# EAGLE board acoustics (EAGLE 9.1.3)
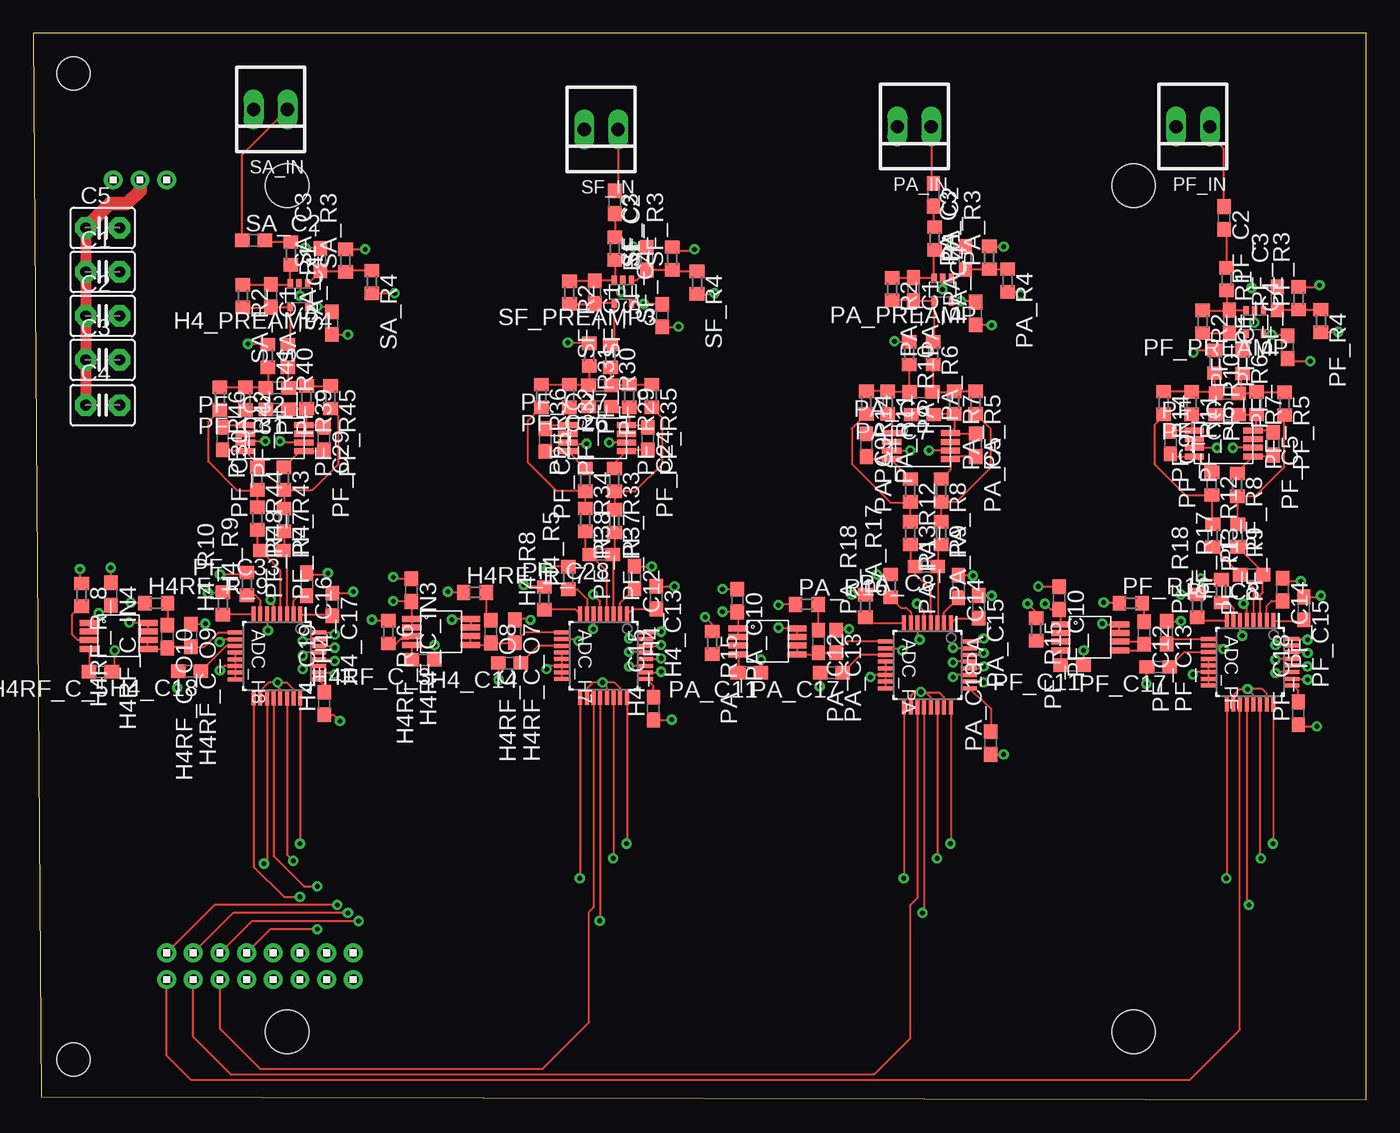
[diagram p0: board, top side]
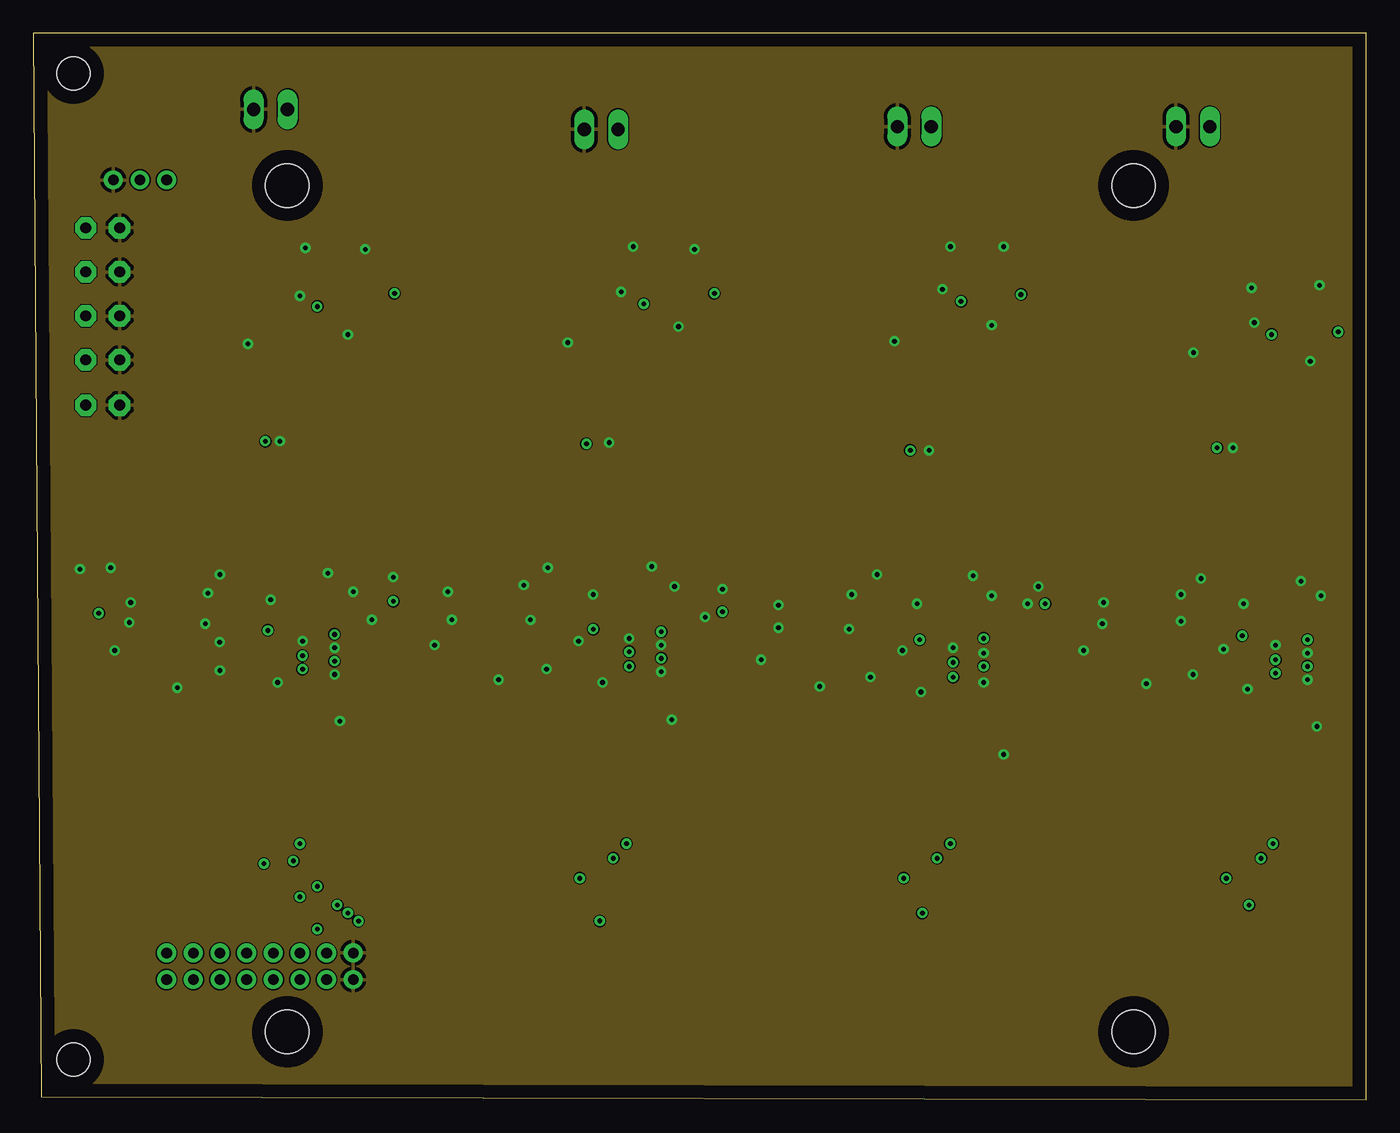
[diagram p1: board, inner layer GND]
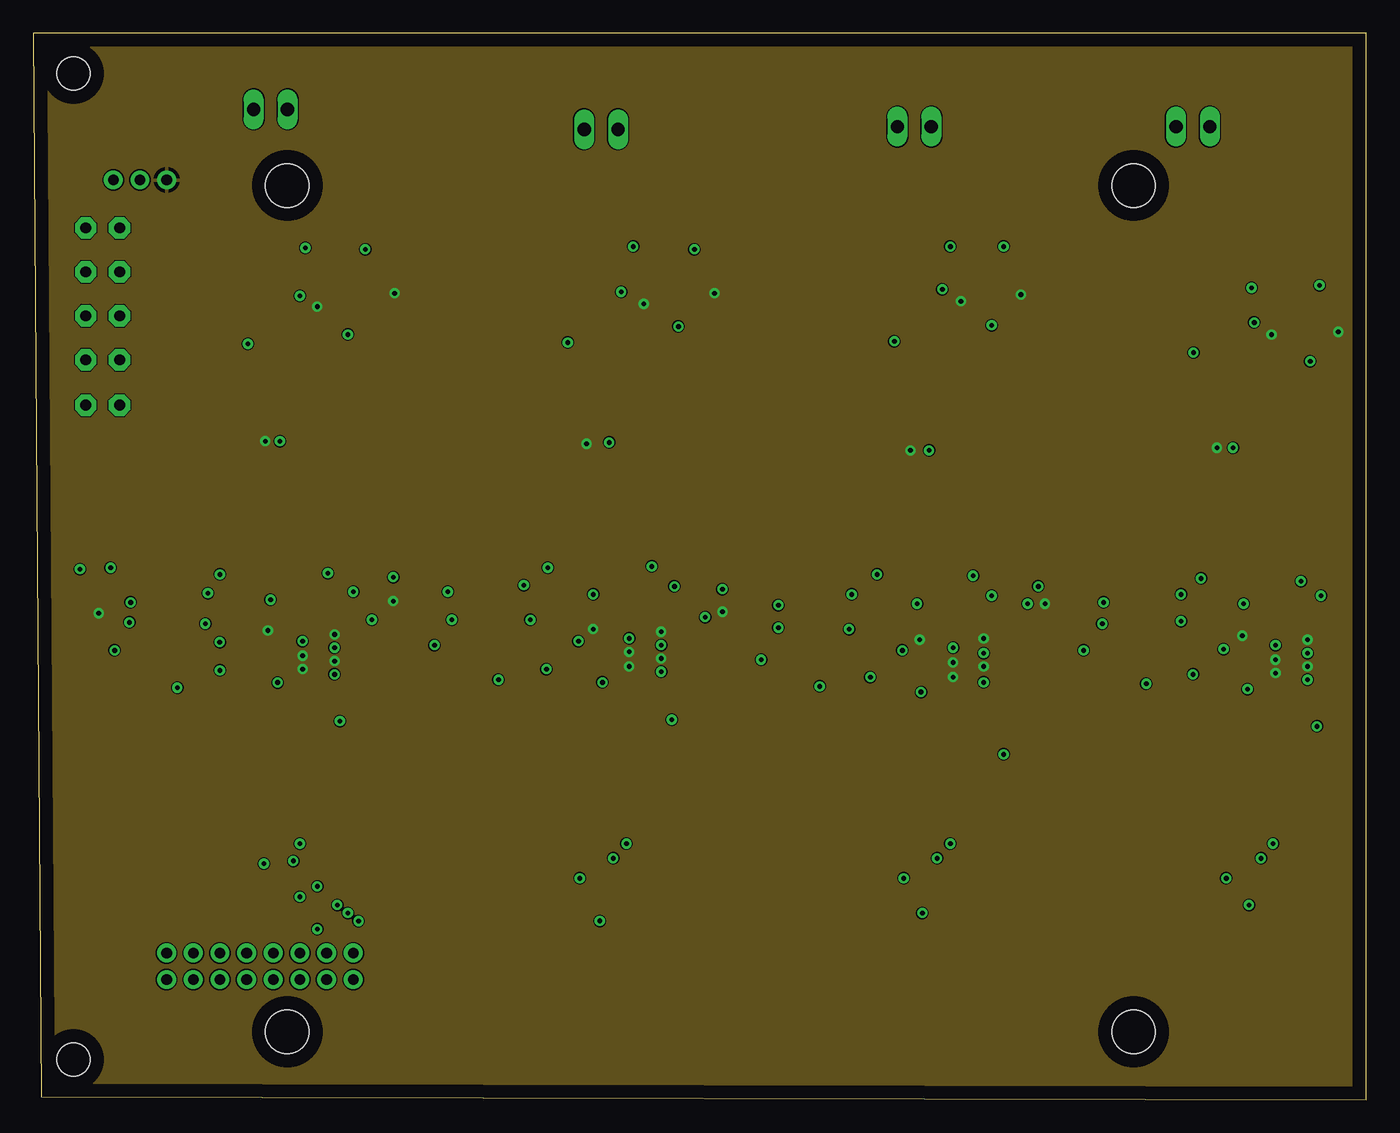
[diagram p2: board, inner layer +3v3]
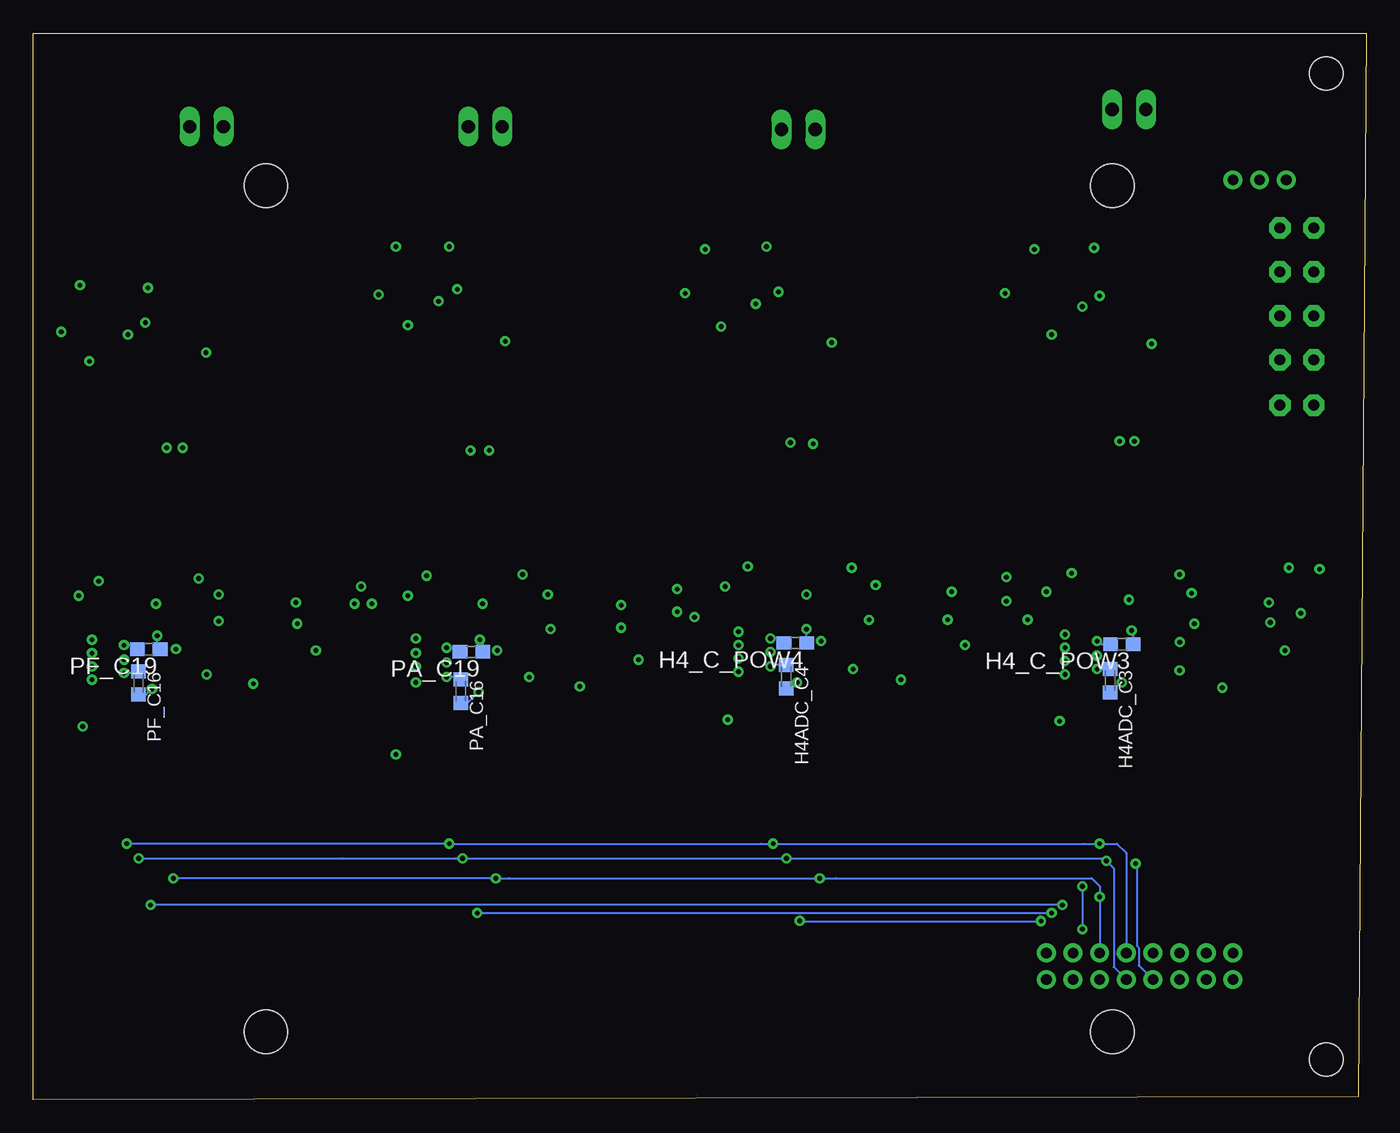
[diagram p3: board, bottom side, seen from below]

Size 100 x 80 mm. Coordinates in mm from the lower left corner, seen from the top.
Outline: 0.6,0.2 100,0 100,80 0,80 0.6,0.2
Copper layers (1+2*15+16): Top 0.035mm / dielectric 1.5mm / GND 0.017mm / dielectric 0.15mm / +3v3 0.017mm / dielectric 0.2mm / Bottom 0.035mm
Design rules "default *": minimum track width 3.5mil, minimum drill 0.2mm, track to track 3.5mil, track to pad 3.5mil, pad to pad 3.5mil, via to via 3.5mil, smd to smd 0mil, copper to edge 40mil, drill to drill 6mil, minimum pad ring 10mil, minimum via ring 8mil, stop-mask expansion 4mil, vias tented up to drill 0mil, thermal gap 10mil
Holes 2.5 mm at 3,77 3,3
Holes 3.26 mm at 19.05,68.58 82.55,68.58 82.55,5.08 19.05,5.08

## Footprints (pad centres in the part's own frame; a part is rotated, then mirrored left to right if it is on the bottom)
PBS0032A_L = smd 1.2 x 0.3: 1 -3.1,1.75; 2 -3.1,1.25; 3 -3.1,0.75; 4 -3.1,0.25; 5 -3.1,-0.25; 6 -3.1,-0.75; 7 -3.1,-1.25; 8 -3.1,-1.75; 17 3.1,-1.75; 18 3.1,-1.25; 19 3.1,-0.75; 20 3.1,-0.25; 21 3.1,0.25; 22 3.1,0.75; 23 3.1,1.25; 24 3.1,1.75 | smd 0.3 x 1.2: 9 -1.75,-3.1; 10 -1.25,-3.1; 11 -0.75,-3.1; 12 -0.25,-3.1; 13 0.25,-3.1; 14 0.75,-3.1; 15 1.25,-3.1; 16 1.75,-3.1; 25 1.75,3.1; 26 1.25,3.1; 27 0.75,3.1; 28 0.25,3.1; 29 -0.25,3.1; 30 -0.75,3.1; 31 -1.25,3.1; 32 -1.75,3.1
C2.5-3 = drill 0.813 pad 1.6 octagon: 1 -1.27,0; 2 1.27,0
C0603 = smd 1.1 x 1: 1 -0.85,0; 2 0.85,0
SC70-5 = smd 0.4 x 0.7: 1 -0.65,-0.85; 2 0,-0.85; 3 0.65,-0.85; 4 0.65,0.85; 5 -0.65,0.85
R0603 = smd 1 x 1.1: 1 -0.85,0; 2 0.85,0
REF6025 = smd 0.45 x 1.45: 1 -0.975,-2.2; 2 -0.325,-2.2; 3 0.325,-2.2; 4 0.975,-2.2; 5 0.975,2.2; 6 0.325,2.2; 7 -0.325,2.2; 8 -0.975,2.2
C0603K = smd 1.05 x 1.08: 1 -0.875,0; 2 0.875,0
VSSOP-8 = smd 0.45 x 1.45: 1 0,0; 2 0.65,0; 3 1.3,0; 4 1.95,0; 5 1.95,4.4; 6 1.3,4.4; 7 0.65,4.4; 8 0,4.4
22-23-2021 = drill 1 long: 1 -1.27,0; 2 1.27,0
1X3 = drill 0.8 pad 1.422: 1 -2,0; 2 0,0; 3 2,0
2X8 = drill 0.8 pad 1.422: 1 -7,-1; 2 -7,1; 3 -5,-1; 4 -5,1; 5 -3,-1; 6 -3,1; 7 -1,-1; 8 -1,1; 9 1,-1; 10 1,1; 11 3,-1; 12 3,1; 13 5,-1; 14 5,1; 15 7,-1; 16 7,1

## Placement (x,y rotation side)
ADC_H7  ADS124S08IPBSRPBS0032A_L  [PBS0032A_L]  42.78,33.3 270 top
ADC_H8  ADS124S08IPBSRPBS0032A_L  [PBS0032A_L]  18.28,33.28 270 top
ADC_PA  ADS124S08IPBSRPBS0032A_L  [PBS0032A_L]  67.08,32.61 270 top
ADC_PF  ADS124S08IPBSRPBS0032A_L  [PBS0032A_L]  91.28,32.83 270 top
C1  [C2.5-3]  5.2,62.1 0 top
C2  [C2.5-3]  5.2,58.8 0 top
C3  [C2.5-3]  5.2,55.5 0 top
C4  [C2.5-3]  5.2,52.1 0 top
C5  [C2.5-3]  5.2,65.4 0 top
H4_C12  1uf  [C0603]  45.11,39.17 270 top
H4_C13  1uf  [C0603]  46.73,37.65 270 top
H4_C14  1uf  [C0603]  35.73,32.75 180 top
H4_C15  1uf  [C0603]  46.53,29.33 90 top
H4_C16  1uf  [C0603]  20.51,38.66 270 top
H4_C17  1uf  [C0603]  22.43,37.14 270 top
H4_C18  1uf  [C0603]  11.72,32.14 180 top
H4_C19  1uf  [C0603]  21.83,29.72 90 top
H4_C_POW3  1uf  [C0603]  18.33,34.17 180 bottom
H4_C_POW4  1uf  [C0603]  42.83,34.26 180 bottom
H4_PREAMP4  TLV6741  [SC70-5]  19.93,60.34 180 top
H4_R5  60.4k  [R0603]  40.12,39.13 90 top
H4_R8  10K  [R0603]  38.33,37.61 90 top
H4_R9  60.4k  [R0603]  16.03,38.7 90 top
H4_R10  10K  [R0603]  14.22,37.22 90 top
H4_REFGEN3  REF6025  [REF6025]  30.59,35.09 270 top
H4_REFGEN4  REF6025  [REF6025]  6.39,34.79 270 top
H4ADC_C3  1uf  [C0603K]  19.21,31.43 270 bottom
H4ADC_C4  1uf  [C0603K]  43.51,31.71 270 bottom
H4RF_C_3  1uf  [C0603]  29.23,32.99 180 top
H4RF_C_5  1uf  [C0603]  5.03,32.09 180 top
H4RF_C_IN3  10uf  [C0603]  28.36,38.22 270 top
H4RF_C_IN4  10uf  [C0603]  5.83,37.94 270 top
H4RF_C_O7  100nf  [C0603]  36.13,35.13 270 top
H4RF_C_O8  47uf  [C0603]  34.33,35.11 270 top
H4RF_C_O9  100nf  [C0603]  11.83,34.81 270 top
H4RF_C_O10  47uf  [C0603]  10.06,34.73 270 top
H4RF_R_6  121k  [R0603]  26.63,35.07 270 top
H4RF_R_7  47m  [R0603]  33.13,38.05 0 top
H4RF_R_8  121k  [R0603]  3.63,37.87 270 top
H4RF_R_9  47m  [R0603]  9.23,37.25 0 top
PA_C1  1pF  [C0603]  66.03,60.82 270 top
PA_C2  5nF  [C0603]  67.53,67.88 270 top
PA_C3  10uF  [C0603]  69.93,63.15 90 top
PA_C4  100nF  [C0603]  70.69,58.98 90 top
PA_C5  270pF  [C0603]  70.7,49.1 270 top
PA_C6  470 pF  [C0603]  66.6,53.1 180 top
PA_C7  1nF  [C0603]  66.7,51.4 180 top
PA_C8  22nF  [C0603]  67,40 180 top
PA_C9  270pF  [C0603]  62.5,49.1 270 top
PA_C10  10uf  [C0603]  52.82,37.44 270 top
PA_C11  1uf  [C0603]  53.71,32.03 180 top
PA_C12  47uf  [C0603]  58.91,34.37 270 top
PA_C13  100nf  [C0603]  60.23,34.37 270 top
PA_C14  1uf  [C0603]  69.41,38.49 270 top
PA_C15  1uf  [C0603]  70.93,36.97 270 top
PA_C16  1uf  [C0603K]  67.91,30.64 270 bottom
PA_C17  1uf  [C0603]  59.89,32.03 180 top
PA_C18  1uf  [C0603]  71.83,26.75 90 top
PA_C19  1uf  [C0603]  67.13,33.59 180 bottom
PA_DA  THS4551  [VSSOP-8]  64.4,50 270 top
PA_IN  22-23-2021  [22-23-2021]  66.1,73 180 top
PA_PREAMP  TLV6741  [SC70-5]  68.23,60.76 180 top
PA_R1  10k  [R0603]  67.63,64.6 270 top
PA_R2  1 M  [R0603]  64.43,60.8 270 top
PA_R3  100k  [R0603]  71.73,63.16 90 top
PA_R4  100k  [R0603]  73.09,61.46 270 top
PA_R5  1.2k  [R0603]  70.7,52.3 270 top
PA_R6  1.2K  [R0603]  67.5,56 270 top
PA_R7  330  [R0603]  69.1,52.3 270 top
PA_R8  5  [R0603]  68.1,45.7 270 top
PA_R9  10  [R0603]  68.1,42.5 270 top
PA_R10  1.2k  [R0603]  65.7,56 270 top
PA_R11  330  [R0603]  64.1,52.3 270 top
PA_R12  5  [R0603]  65.8,45.7 270 top
PA_R13  10  [R0603]  65.8,42.5 270 top
PA_R14  1.2k  [R0603]  62.5,52.3 270 top
PA_R15  121k  [R0603]  50.93,34.27 270 top
PA_R16  47m  [R0603]  58.03,37.15 0 top
PA_R17  60.4k  [R0603]  64.31,38.55 90 top
PA_R18  10K  [R0603]  62.43,37.03 90 top
PA_REFGEN  REF6025  [REF6025]  55.09,34.39 270 top
PF_C1  1pF  [C0603]  89.73,58.38 270 top
PF_C2  5nF  [C0603]  89.33,66.14 270 top
PF_C3  10uF  [C0603]  93.33,60.1 90 top
PF_C4  100nF  [C0603]  94.09,56.44 90 top
PF_C5  270pF  [C0603]  93.02,49.2 270 top
PF_C6  470 pF  [C0603]  89.58,53 180 top
PF_C7  1nF  [C0603]  89.57,51.4 180 top
PF_C8  22nF  [C0603]  91.41,39.38 180 top
PF_C9  270pF  [C0603]  85.31,49.29 270 top
PF_C10  10uf  [C0603]  76.96,37.62 270 top
PF_C11  1uf  [C0603]  77.93,32.59 180 top
PF_C12  47uf  [C0603]  83.33,35.01 270 top
PF_C13  100nf  [C0603]  85.03,35.03 270 top
PF_C14  1uf  [C0603]  93.73,38.26 270 top
PF_C15  1uf  [C0603]  95.31,36.86 270 top
PF_C16  1uf  [C0603K]  92.1,31.26 270 bottom
PF_C17  1uf  [C0603]  84.4,32.46 180 top
PF_C18  1uf  [C0603]  94.91,28.98 90 top
PF_C19  1uf  [C0603]  91.33,33.78 180 bottom
PF_C24  270pF  [C0603]  46.1,49.6 270 top
PF_C25  270pF  [C0603]  38.4,49.5 270 top
PF_C26  1nF  [C0603]  42.5,52 180 top
PF_C27  470 pF  [C0603]  42.5,53.6 180 top
PF_C28  22nF  [C0603]  42.6,40.9 180 top
PF_C29  270pF  [C0603]  21.8,49.6 270 top
PF_C30  270pF  [C0603]  14.2,49.6 270 top
PF_C31  1nF  [C0603]  18.3,51.8 180 top
PF_C32  470 pF  [C0603]  18.3,53.4 180 top
PF_C33  22nF  [C0603]  17.9,41.2 180 top
PF_DA  THS4551  [VSSOP-8]  87.1,50.2 270 top
PF_DA2  THS4551  [VSSOP-8]  40.1,50.6 270 top
PF_DA3  THS4551  [VSSOP-8]  15.9,50.6 270 top
PF_IN  22-23-2021  [22-23-2021]  87,73 180 top
PF_PREAMP  TLV6741  [SC70-5]  91.63,58.32 180 top
PF_R1  10k  [R0603]  89.53,61.56 270 top
PF_R2  1 M  [R0603]  87.73,58.36 270 top
PF_R3  100k  [R0603]  94.93,60.12 90 top
PF_R4  100k  [R0603]  96.59,58.42 270 top
PF_R5  1.2k  [R0603]  93.87,52.21 270 top
PF_R6  1.2K  [R0603]  90.73,55.32 270 top
PF_R7  330  [R0603]  91.78,52.24 270 top
PF_R8  5  [R0603]  90.33,46.12 270 top
PF_R9  10  [R0603]  90.36,42.33 270 top
PF_R10  1.2k  [R0603]  88.63,55.36 270 top
PF_R11  330  [R0603]  86.91,52.26 270 top
PF_R12  5  [R0603]  88.42,46.2 270 top
PF_R13  10  [R0603]  88.49,42.3 270 top
PF_R14  1.2k  [R0603]  84.79,52.27 270 top
PF_R15  121k  [R0603]  75.23,35.26 270 top
PF_R16  47m  [R0603]  82.33,37.24 0 top
PF_R17  60.4k  [R0603]  89.13,38.14 90 top
PF_R18  10K  [R0603]  87.31,37.04 90 top
PF_R29  330  [R0603]  44.7,52.8 270 top
PF_R30  1.2K  [R0603]  43.3,55.8 270 top
PF_R31  1.2k  [R0603]  41.7,55.9 270 top
PF_R32  330  [R0603]  40.2,52.8 270 top
PF_R33  5  [R0603]  43.6,46.5 270 top
PF_R34  5  [R0603]  41.4,46.5 270 top
PF_R35  1.2k  [R0603]  46.4,52.8 270 top
PF_R36  1.2k  [R0603]  38.1,52.8 270 top
PF_R37  10  [R0603]  43.6,43.4 270 top
PF_R38  10  [R0603]  41.4,43.5 270 top
PF_R39  330  [R0603]  20.5,52.7 270 top
PF_R40  1.2K  [R0603]  19.1,55.8 270 top
PF_R41  1.2k  [R0603]  17.6,55.8 270 top
PF_R42  330  [R0603]  15.9,52.6 270 top
PF_R43  5  [R0603]  18.8,46.6 270 top
PF_R44  5  [R0603]  16.8,46.6 270 top
PF_R45  1.2k  [R0603]  22.3,52.7 270 top
PF_R46  1.2k  [R0603]  14,52.6 270 top
PF_R47  10  [R0603]  18.8,43.5 270 top
PF_R48  10  [R0603]  16.8,43.6 270 top
PF_REFGEN  REF6025  [REF6025]  79.29,34.68 270 top
SA_C1  1pF  [C0603]  17.83,60.3 270 top
SA_C2  5nF  [C0603]  16.53,64.46 0 top
SA_C3  10uF  [C0603]  21.53,63.02 90 top
SA_C4  100nF  [C0603]  22.39,58.26 90 top
SA_IN  22-23-2021  [22-23-2021]  17.8,74.3 180 top
SA_R1  10k  [R0603]  19.33,63.48 270 top
SA_R2  1 M  [R0603]  15.73,60.28 270 top
SA_R3  100k  [R0603]  23.43,62.94 90 top
SA_R4  100k  [R0603]  25.39,61.34 270 top
SF_C1  1pF  [C0603]  42.13,60.56 270 top
SF_C2  5nF  [C0603]  43.63,67.32 270 top
SF_C3  10uF  [C0603]  46.03,63.09 90 top
SF_C4  100nF  [C0603]  47.19,58.82 90 top
SF_IN  22-23-2021  [22-23-2021]  42.6,72.8 180 top
SF_PREAMP3  TLV6741  [SC70-5]  44.23,60.6 180 top
SF_R1  10k  [R0603]  43.63,63.84 270 top
SF_R2  1 M  [R0603]  40.23,60.54 270 top
SF_R3  100k  [R0603]  47.93,63.1 90 top
SF_R4  100k  [R0603]  49.8,61.3 270 top
U$1  1X3  [1X3]  8,69 180 top
U$2  2X8  [2X8]  17,10 0 top

## Library data of the parts
ADC_H7 ADC_H8 ADC_PA ADC_PF = ADS127L01_ADC
C1-C5 = capacitor-wima
H4_C12-H4_C19 H4_C_POW3 H4_C_POW4 H4_R5 H4_R8-H4_R10 H4ADC_C3 H4ADC_C4 H4RF_C_3 H4RF_C_5 H4RF_C_IN3 H4RF_C_IN4 H4RF_C_O7-H4RF_C_O10 PA_C10-PA_C19 PA_R17 PA_R18 PF_C10-PF_C19 PF_R17 PF_R18 = rcl
H4_PREAMP4 PA_PREAMP PF_PREAMP SF_PREAMP3 = lio
H4_REFGEN3 H4_REFGEN4 PA_REFGEN PF_REFGEN = REF6025
H4RF_R_6-H4RF_R_9 PA_C1-PA_C9 PA_R1-PA_R16 PF_C1-PF_C9 PF_C24-PF_C33 PF_R1-PF_R16 PF_R29-PF_R48 SA_C1-SA_C4 SA_R1-SA_R4 SF_C1-SF_C4 SF_R1-SF_R4 = resistor
PA_DA PF_DA PF_DA2 PF_DA3 = THS4551
PA_IN PF_IN SA_IN SF_IN = con-molex; MF: MOLEX; MPN: 22-23-2021; OC_FARNELL: 1462926; OC_NEWARK: 25C3832
U$1 U$2 = headers(2mm)

## Nets
+3V3: ADC_H7.6 ADC_H7.27 ADC_H7.28 ADC_H7.29 ADC_H7.32 ADC_H8.6 ADC_H8.27 ADC_H8.28 ADC_H8.29 ADC_H8.32 ADC_PA.6 ADC_PA.27 ADC_PA.28 ADC_PA.29 ADC_PA.32 ADC_PF.6 ADC_PF.27 ADC_PF.28 ADC_PF.29 ADC_PF.32 H4_C_POW3.1 H4_C_POW4.1 H4_PREAMP4.5 H4_REFGEN3.1 H4_REFGEN3.2 H4_REFGEN4.1 H4_REFGEN4.2 H4ADC_C3.1 H4ADC_C4.1 H4RF_C_IN3.2 H4RF_C_IN4.2 PA_C4.2 PA_C10.2 PA_C16.1 PA_C19.1 PA_DA.3 PA_PREAMP.5 PA_R4.2 PA_REFGEN.1 PA_REFGEN.2 PF_C4.2 PF_C10.2 PF_C16.1 PF_C19.1 PF_DA2.3 PF_DA3.3 PF_DA.3 PF_PREAMP.5 PF_R4.2 PF_REFGEN.1 PF_REFGEN.2 SA_C4.2 SA_R4.2 SF_C4.2 SF_PREAMP3.5 SF_R4.2 U$1.1
+5V: C1.1 C2.1 C3.1 C4.1 C5.1 U$1.2
AMPED_PA: PA_C1.2 PA_PREAMP.4 PA_R2.2 PA_R6.1
AMPED_PF: PF_C1.2 PF_PREAMP.4 PF_R2.2 PF_R6.1
AMPED_SA: H4_PREAMP4.4 PF_R40.1 SA_C1.2 SA_R2.2
AMPED_SF: PF_R30.1 SF_C1.2 SF_PREAMP3.4 SF_R2.2
CLK: ADC_H7.24 ADC_H8.24 ADC_PA.24 ADC_PF.24 U$2.10
DIFF_N_PA: ADC_PA.3 PA_C8.1 PA_R9.2
DIFF_N_PF: ADC_PF.3 PF_C8.1 PF_R9.2
DIFF_N_SA: ADC_H8.3 PF_C33.1 PF_R47.2
DIFF_N_SF: ADC_H7.3 PF_C28.1 PF_R37.2
DIFF_P_PA: ADC_PA.4 PA_C8.2 PA_R13.2
DIFF_P_PF: ADC_PF.4 PF_C8.2 PF_R13.2
DIFF_P_SA: ADC_H8.4 PF_C33.2 PF_R48.2
DIFF_P_SF: ADC_H7.4 PF_C28.2 PF_R38.2
DOUT_PA: ADC_PA.20 U$2.4
DOUT_PF: ADC_PF.20 U$2.2
DOUT_SA: ADC_H8.20 U$2.8
DOUT_SF: ADC_H7.20 U$2.6
DRDY_PA: ADC_PA.19 U$2.3
DRDY_PF: ADC_PF.19 U$2.1
DRDY_SA: ADC_H8.19 U$2.7
DRDY_SF: ADC_H7.19 U$2.5
GND: ADC_H7.5 ADC_H7.10 ADC_H7.12 ADC_H7.13 ADC_H7.14 ADC_H7.15 ADC_H7.16 ADC_H7.18 ADC_H7.21 ADC_H7.23 ADC_H7.26 ADC_H7.30 ADC_H7.31 ADC_H8.5 ADC_H8.10 ADC_H8.12 ADC_H8.13 ADC_H8.14 ADC_H8.15 ADC_H8.16 ADC_H8.18 ADC_H8.21 ADC_H8.23 ADC_H8.26 ADC_H8.30 ADC_H8.31 ADC_PA.5 ADC_PA.10 ADC_PA.12 ADC_PA.13 ADC_PA.14 ADC_PA.15 ADC_PA.16 ADC_PA.18 ADC_PA.21 ADC_PA.23 ADC_PA.26 ADC_PA.30 ADC_PA.31 ADC_PF.5 ADC_PF.10 ADC_PF.12 ADC_PF.13 ADC_PF.14 ADC_PF.15 ADC_PF.16 ADC_PF.18 ADC_PF.21 ADC_PF.23 ADC_PF.26 ADC_PF.30 ADC_PF.31 C1.2 C2.2 C3.2 C4.2 C5.2 H4_C12.1 H4_C13.1 H4_C14.2 H4_C15.1 H4_C16.1 H4_C17.1 H4_C18.2 H4_C19.1 H4_C_POW3.2 H4_C_POW4.2 H4_PREAMP4.2 H4_R5.2 H4_R8.2 H4_R9.2 H4_R10.2 H4_REFGEN3.7 H4_REFGEN3.8 H4_REFGEN4.7 H4_REFGEN4.8 H4ADC_C3.2 H4ADC_C4.2 H4RF_C_3.1 H4RF_C_5.1 H4RF_C_IN3.1 H4RF_C_IN4.1 H4RF_C_O7.1 H4RF_C_O9.1 H4RF_R_6.1 H4RF_R_7.1 H4RF_R_8.1 H4RF_R_9.1 PA_C3.2 PA_C4.1 PA_C10.1 PA_C11.1 PA_C13.1 PA_C14.1 PA_C15.1 PA_C16.2 PA_C17.2 PA_C18.1 PA_C19.2 PA_DA.6 PA_IN.2 PA_PREAMP.2 PA_R3.2 PA_R10.1 PA_R15.1 PA_R16.1 PA_R17.2 PA_R18.2 PA_REFGEN.7 PA_REFGEN.8 PF_C3.2 PF_C4.1 PF_C10.1 PF_C11.1 PF_C13.1 PF_C14.1 PF_C15.1 PF_C16.2 PF_C17.2 PF_C18.1 PF_C19.2 PF_DA2.6 PF_DA3.6 PF_DA.6 PF_IN.2 PF_PREAMP.2 PF_R3.2 PF_R10.1 PF_R15.1 PF_R16.1 PF_R17.2 PF_R18.2 PF_R31.1 PF_R41.1 PF_REFGEN.7 PF_REFGEN.8 SA_C3.2 SA_C4.1 SA_IN.2 SA_R3.2 SF_C3.2 SF_C4.1 SF_IN.2 SF_PREAMP3.2 SF_R3.2 U$1.3 U$2.15 U$2.16
N$1: PA_C5.2 PA_DA.5 PA_R8.1
N$2: PA_C5.1 PA_C7.1 PA_DA.8 PA_R7.2
N$3: PA_C7.2 PA_C9.1 PA_DA.1 PA_R11.2
N$4: PA_C6.1 PA_R5.1 PA_R6.2 PA_R7.1
N$5: PA_C6.2 PA_R10.2 PA_R11.1 PA_R14.1
N$6: PA_C9.2 PA_DA.4 PA_R12.1
N$7: PA_R5.2 PA_R8.2 PA_R9.1
N$8: PA_R12.2 PA_R13.1 PA_R14.2
N$9: PF_C24.2 PF_DA2.5 PF_R33.1
N$10: PF_C24.1 PF_C26.1 PF_DA2.8 PF_R29.2
N$11: PF_C25.1 PF_C26.2 PF_DA2.1 PF_R32.2
N$12: PF_C27.1 PF_R29.1 PF_R30.2 PF_R35.1
N$13: PF_C27.2 PF_R31.2 PF_R32.1 PF_R36.1
N$14: PF_C25.2 PF_DA2.4 PF_R34.1
N$15: PF_R33.2 PF_R35.2 PF_R37.1
N$16: PF_R34.2 PF_R36.2 PF_R38.1
N$17: PF_C29.2 PF_DA3.5 PF_R43.1
N$18: PF_C29.1 PF_C31.1 PF_DA3.8 PF_R39.2
N$19: PF_C30.1 PF_C31.2 PF_DA3.1 PF_R42.2
N$20: PF_C32.1 PF_R39.1 PF_R40.2 PF_R45.1
N$21: PF_C32.2 PF_R41.2 PF_R42.1 PF_R46.1
N$22: PF_C30.2 PF_DA3.4 PF_R44.1
N$23: PF_R43.2 PF_R45.2 PF_R47.1
N$24: PF_R44.2 PF_R46.2 PF_R48.1
N$88: PF_R12.2 PF_R13.1 PF_R14.2
N$97: PF_C5.2 PF_DA.5 PF_R8.1
N$98: PF_C5.1 PF_C7.1 PF_DA.8 PF_R7.2
N$99: PF_C7.2 PF_C9.1 PF_DA.1 PF_R11.2
N$100: PF_C6.1 PF_R5.1 PF_R6.2 PF_R7.1
N$101: PF_C6.2 PF_R10.2 PF_R11.1 PF_R14.1
N$102: PF_C9.2 PF_DA.4 PF_R12.1
N$103: PF_C11.2 PF_REFGEN.4
N$104: PF_R15.2 PF_REFGEN.3
N$105: PF_C12.1 PF_R16.2
N$109: PF_R5.2 PF_R8.2 PF_R9.1
N$110: PA_C11.2 PA_REFGEN.4
N$116: PA_R15.2 PA_REFGEN.3
N$117: PA_C12.1 PA_R16.2
N$118: H4_REFGEN3.4 H4RF_C_3.2
N$121: H4_REFGEN3.3 H4RF_R_6.2
N$124: H4RF_C_O8.1 H4RF_R_7.2
N$129: H4_REFGEN4.4 H4RF_C_5.2
N$130: H4_REFGEN4.3 H4RF_R_8.2
N$131: H4RF_C_O10.1 H4RF_R_9.2
N$132: ADC_PF.2 PF_C14.2
N$133: PF_C2.2 PF_R1.1
N$134: PF_C1.1 PF_PREAMP.3 PF_R1.2 PF_R2.1
N$135: PF_C3.1 PF_PREAMP.1 PF_R3.1 PF_R4.1
N$136: ADC_PA.1 PA_C15.2
N$137: PA_C2.2 PA_R1.1
N$138: PA_C1.1 PA_PREAMP.3 PA_R1.2 PA_R2.1
N$139: PA_C3.1 PA_PREAMP.1 PA_R3.1 PA_R4.1
N$140: ADC_PA.8 PA_R18.1
N$141: SF_C2.2 SF_R1.1
N$142: SF_C1.1 SF_PREAMP3.3 SF_R1.2 SF_R2.1
N$143: SF_C3.1 SF_PREAMP3.1 SF_R3.1 SF_R4.1
N$144: ADC_PA.7 PA_R17.1
N$145: SA_C2.2 SA_R1.1
N$146: H4_PREAMP4.3 SA_C1.1 SA_R1.2 SA_R2.1
N$147: H4_PREAMP4.1 SA_C3.1 SA_R3.1 SA_R4.1
N$148: ADC_PA.11 PA_C17.1
N$149: ADC_PA.25 PA_C18.2
N$150: ADC_PF.1 PF_C15.2
N$151: ADC_PA.2 PA_C14.2
N$152: ADC_PF.8 PF_R18.1
N$153: ADC_PF.7 PF_R17.1
N$154: ADC_PF.11 PF_C17.1
N$155: ADC_PF.25 PF_C18.2
N$156: ADC_H7.1 H4_C13.2
N$157: ADC_H7.8 H4_R8.1
N$158: ADC_H7.7 H4_R5.1
N$159: ADC_H7.11 H4_C14.1
N$160: ADC_H7.25 H4_C15.2
N$161: ADC_H7.2 H4_C12.2
N$162: ADC_H8.1 H4_C17.2
N$163: ADC_H8.8 H4_R10.1
N$164: ADC_H8.7 H4_R9.1
N$165: ADC_H8.11 H4_C18.1
N$166: ADC_H8.25 H4_C19.2
N$167: ADC_H8.2 H4_C16.2
RAW_PA: PA_C2.1 PA_IN.1
RAW_PF: PF_C2.1 PF_IN.1
RAW_SA: SA_C2.1 SA_IN.1
RAW_SF: SF_C2.1 SF_IN.1
REF_PA: ADC_PA.9 PA_C12.2 PA_C13.2 PA_REFGEN.5 PA_REFGEN.6
REF_PF: ADC_PF.9 PF_C12.2 PF_C13.2 PF_REFGEN.5 PF_REFGEN.6
REF_SA: ADC_H8.9 H4_REFGEN4.5 H4_REFGEN4.6 H4RF_C_O9.2 H4RF_C_O10.2
REF_SF: ADC_H7.9 H4_REFGEN3.5 H4_REFGEN3.6 H4RF_C_O7.2 H4RF_C_O8.2
SCLK: ADC_H7.22 ADC_H8.22 ADC_PA.22 ADC_PF.22 U$2.9
START: ADC_H7.17 ADC_H8.17 ADC_PA.17 ADC_PF.17 U$2.12

## Tracks (layer width: path | path; a pad name or v marks a point on that pad's centre or on a via)
+3V3  (via drill 0.35)
  Top 0.152: PF_DA.3 v88.8,48.9 | PA_PREAMP.5 69.59,59.91 | 69.59,59.91 v69.6,59.9 | PA_C4.2 70.61,59.91 69.59,59.91 | PA_DA.3 v65.8,48.7 | v51.7,36.6 52.81,36.6 PA_C10.2 52.89,36.52 PA_REFGEN.1 PA_REFGEN.2 | H4_REFGEN3.2 H4_REFGEN3.1 28.36,36.09 H4RF_C_IN3.2 27.03,37.37 v27,37.4 | H4_REFGEN4.2 H4_REFGEN4.1 v4.91,36.49 5.23,36.49 H4RF_C_IN4.2 | PF_PREAMP.5 92.31,57.4 v92.9,57.4 93.98,57.4 PF_C4.2 | SF_R4.2 51.05,60.45 51.2,60.3 51.2,60.4 v51.1,60.5 | SF_PREAMP3.5 45.65,59.75 45.7,59.7 v45.8,59.7 45.83,59.67 SF_C4.2 | PF_DA2.3 40.2,49.2 v41.5,49.2 | SA_R4.2 26.79,60.49 26.8,60.5 v27.1,60.5 | H4_PREAMP4.5 21.19,59.49 21.2,59.5 v21.3,59.5 22,59.5 SA_C4.2 | PF_DA3.3 16,49.4 v17.4,49.4 | PF_R4.2 97.87,57.57 v97.9,57.6 | PA_R4.2 73.89,60.61 v74.1,60.4 | ADC_H7.32 47.05,35.05 v47.1,35.1 | ADC_H7.28 47.05,33.05 v47.1,33.1 | ADC_H7.29 45.83,33.59 v44.7,33.59 | ADC_H7.27 44.74,32.55 v44.7,32.5 | ADC_H7.6 42.03,35.33 v42,35.3 | ADC_PA.6 66.33,34.67 v66.5,34.5 | ADC_PA.32 71.06,34.36 v71.3,34.6 | ADC_PA.28 71.16,32.36 v71.3,32.5 | ADC_PA.29 69.06,32.86 v69,32.8 | ADC_PA.27 69.16,31.86 v69,31.7 | ADC_PF.32 95.53,34.58 v95.6,34.5 | ADC_PF.28 95.53,32.58 v95.6,32.5 | ADC_PF.27 93.28,32.08 v93.2,32 | ADC_PF.29 93.27,33.08 v93.2,33 | ADC_PF.6 90.53,34.97 v90.7,34.8 | ADC_H8.6 17.53,35.27 v17.6,35.2 | ADC_H8.32 22.47,35.03 v22.6,34.9 | ADC_H8.28 22.47,33.03 v22.6,32.9 | ADC_H8.27 20.43,32.53 v20.2,32.3 | ADC_H8.29 20.43,33.53 v20.2,33.3 | PF_REFGEN.2 PF_REFGEN.1 77.09,36.64 PF_C10.2 76.33,36.77 v75.9,37.2
  Bottom 0.152: H4_C_POW4.1 41.98,35.28 v42,35.3 | H4ADC_C4.1 44.61,32.59 v44.7,32.5 | v66.5,34.5 66.28,34.28 PA_C19.1 | PA_C16.1 68.09,31.7 v69,31.7 | PF_C19.1 90.7,34.01 v90.7,34.8 | PF_C16.1 92.23,32 v93.2,32 | H4_C_POW3.1 17.48,35.08 v17.6,35.2 | H4ADC_C3.1 v20.2,32.3
  pour +3v3: 0,80 100,80 100,0 0,0
+5V
  Top 0.813: C5.1 C1.1 C2.1 C3.1 C4.1
  Top 1.016: C5.1 5.73,67.2 7,67.2 8,68.2 U$1.2
AMPED_PA
  Top 0.152: PA_R2.2 64.45,59.97 PA_C1.2 66.09,59.91 PA_PREAMP.4 67.58,56.93 PA_R6.1
AMPED_PF
  Top 0.152: PF_R2.2 89.71,57.51 PF_C1.2 90.92,57.53 PF_PREAMP.4 90.98,56.42 PF_R6.1
AMPED_SA
  Top 0.152: SA_R2.2 17.81,59.43 SA_C1.2 19.24,59.45 H4_PREAMP4.4 19.28,56.83 PF_R40.1
AMPED_SF
  Top 0.152: SF_R2.2 42.11,59.69 SF_C1.2 42.17,59.75 SF_PREAMP3.4 43.58,57.8 43.58,56.93 PF_R30.1
CLK  (via drill 0.35)
  Top 0.152: ADC_H7.24 44.53,19.23 v44.5,19.2 | ADC_PA.24 68.83,19.23 v68.8,19.2 | ADC_PF.24 93.03,19.23 v93,19.2 | ADC_H8.24 20.03,19.23 v20,19.2
  Bottom 0.152: U$2.10 18,18.5 18.7,19.2 v20,19.2 21.2,19.2 v44.5,19.2 45.4,19.2 v68.8,19.2 v93,19.2
DIFF_N_PA
  Top 0.152: PA_R9.2 67.85,41.4 PA_C8.1 67.85,35.73 ADC_PA.3
DIFF_N_PF
  Top 0.152: ADC_PF.3 92,35.95 92,37.8 92.26,38.06 PF_C8.1 92.26,39.58 PF_R9.2
DIFF_N_SA
  Top 0.152: PF_R47.2 18.8,41.25 PF_C33.1 19.03,40.92 ADC_H8.3
DIFF_N_SF
  Top 0.152: PF_R37.2 43.6,41.05 43.52,40.98 | 43.52,40.98 PF_C28.1 | ADC_H7.3 43.53,40.97 43.52,40.98
DIFF_P_PA
  Top 0.152: PA_R13.2 65.8,40.35 PA_C8.2 66.15,39.45 67.33,38.27 ADC_PA.4
DIFF_P_PF
  Top 0.152: PF_R13.2 90.39,39.55 90.39,39.54 PF_C8.2 91.53,38.4 ADC_PF.4
DIFF_P_SA
  Top 0.152: PF_R48.2 16.8,41.45 PF_C33.2 18.53,39.72 ADC_H8.4
DIFF_P_SF
  Top 0.152: PF_R38.2 41.4,41.25 PF_C28.2 43.03,39.62 ADC_H7.4
DOUT_PA  (via drill 0.35)
  Top 0.152: v23.6,13.99 14.99,13.99 U$2.4 | ADC_PA.20 66.83,14.12 v66.7,13.99
  Bottom 0.152: v66.7,13.99 v23.6,13.99
DOUT_PF  (via drill 0.35)
  Top 0.152: v22.8,14.6 13.6,14.6 U$2.2 | ADC_PF.20 91.03,14.77 v91.2,14.6
  Bottom 0.152: v22.8,14.6 v91.2,14.6
DOUT_SA  (via drill 0.35)
  Top 0.152: v21.3,12.78 17.78,12.78 U$2.8 | ADC_H8.20 18.03,18.27 20.31,15.99 v21.3,15.99
  Bottom 0.152: v21.3,15.99 v21.3,12.78
DOUT_SF  (via drill 0.35)
  Top 0.152: v24.4,13.39 16.39,13.39 U$2.6 | ADC_H7.20 42.53,13.43 v42.5,13.4
  Bottom 0.152: v42.5,13.4 42.49,13.39 v24.4,13.39
DRDY_PA
  Top 0.152: U$2.3 12,4.7 14.8,1.9 63.1,1.9 65.8,4.6 65.8,14.6 66.33,15.13 ADC_PA.19
DRDY_PF
  Top 0.152: U$2.1 10,3.3 11.8,1.5 86.78,1.5 90.53,5.25 ADC_PF.19
DRDY_SA  (via drill 0.35)
  Top 0.152: ADC_H8.19 17.53,17.93 v17.3,17.7
  Bottom 0.152: U$2.7 17.06,10.06 17.06,11.39 17.2,11.53 17.2,17.6 v17.3,17.7
DRDY_SF
  Top 0.152: U$2.5 14,5.3 17,2.3 38.2,2.3 41.7,5.8 41.7,14.1 42.03,14.43 ADC_H7.19
GND  (via drill 0.35)
  Top 0.152: PF_DA.6 v90,48.9 | PF_R10.1 87.3,56.21 87.09,56 v87.04,56.04 | PA_C4.1 71.87,58.13 v71.9,58.1 | PA_DA.6 v67.2,48.7 | PA_C18.1 v72.8,25.9 | PA_REFGEN.7 PA_REFGEN.8 55.94,35.36 v55.9,35.4 | PA_C10.1 51.71,38.29 v51.7,38.3 | PA_C11.1 54.56,32.96 v54.6,33 | PA_R16.1 55.95,37.15 v55.9,37.1 | PA_C15.1 71.88,37.82 v71.9,37.8 | PA_C14.1 70.46,39.34 v70.5,39.3 | PA_R17.2 v63.3,39.4 | PA_R18.2 61.42,37.88 v61.4,37.9 | PA_C17.2 59.04,31.04 v59,31 | PA_C13.1 60.31,35.3 v61.2,35.3 | PA_R10.1 64.65,56.85 v64.6,56.9 | PA_PREAMP.2 68.2,61.58 v68.2,60.8 | PA_R3.2 v72.79,64.01 v72.8,64 | PA_C3.2 v68.81,63.99 v68.8,64 | H4_REFGEN3.7 H4_REFGEN3.8 31.44,36.06 31.4,36.1 v31.4,36 | H4_REFGEN4.7 H4_REFGEN4.8 7.47,35.77 7.4,35.7 7.3,35.8 v7.2,35.8 | H4_C19.1 22.53,28.87 v23,28.4 | PF_PREAMP.2 91.65,58.35 v91.6,58.3 | PF_C3.2 93.27,60.9 v91.4,60.9 | PF_R3.2 96.37,60.97 v96.5,61.1 | PF_C4.1 94.28,55.4 v95.8,55.4 | PF_R17.2 87.51,38.99 87.5,39 v87.6,39.1 | PF_C14.1 93.94,38.9 v95.1,38.9 | PF_C15.1 95.33,37.7 96.5,37.7 v96.6,37.8 | PF_C18.1 95.05,28 v96.3,28 | PF_R18.2 v86.11,37.89 v86.1,37.9 | PF_C13.1 86.08,35.88 v86.1,35.9 | PF_C17.2 83.5,32.41 v83.5,31.2 | PF_R16.1 80.34,37.24 80.3,37.2 v80.3,37.3 | PF_C11.1 78.8,32.61 v78.8,33.7 | PF_C10.1 75.47,38.47 75.4,38.4 v75.4,38.5 | SF_C3.2 44.87,63.94 44.8,64 v45,64 | SF_R3.2 48.18,63.7 49.6,63.7 v49.6,63.8 | SF_C4.1 48.43,57.97 48.5,57.9 v48.4,58 | PF_R31.1 40.15,56.75 v40.1,56.8 | PF_DA2.6 v43.2,49.3 | H4_R5.2 38.62,39.98 38.6,40 v38.6,39.9 | H4_R8.2 38.29,38.5 36.9,38.5 v36.8,38.6 | H4_C12.1 45.14,40 v46.4,40 | H4_C13.1 v48.1,38.5 | H4_C15.1 47.78,28.48 47.8,28.5 v47.9,28.5 | ADC_H7.16 ADC_H7.15 ADC_H7.14
  Top 0.152: ADC_H7.14 ADC_H7.13 ADC_H7.12 | H4RF_R_7.1 31.05,38.05 31,38.1 v31.1,38.1 | H4RF_C_3.1 30.1,33.01 v30.1,34.1 | H4RF_R_6.1 25.62,35.92 25.5,35.8 25.4,35.9 v25.4,36 | H4RF_C_IN3.1 26.93,39.07 26.9,39.1 v27,39.2 | H4_C14.2 34.9,32.73 v34.9,31.5 | H4RF_C_O7.1 36.25,36.1 37.3,36.1 v37.3,36 v37.3,35.99 | SA_C3.2 21.5,63.9 v20.41,63.9 | SA_R3.2 v24.89,63.79 v24.9,63.8 | SA_C4.1 23.49,57.41 23.6,57.3 v23.6,57.4 | H4_PREAMP4.2 20,61.12 v20,60.3 | PF_R41.1 17.55,56.7 v16.1,56.7 | PF_DA3.6 18.6,49.3 v18.5,49.4 | H4_C16.1 20.62,39.4 22,39.4 v22.1,39.5 | H4_C17.1 23.91,37.99 24,37.9 v24,38.1 | H4_R9.2 15.88,39.4 v14,39.4 | H4_R10.2 14.16,38 v13.1,38 | H4RF_C_O9.1 12.94,35.66 13,35.6 v12.9,35.7 | H4_C18.2 10.88,30.98 v10.8,30.9 | H4RF_R_9.1 7.35,37.25 v7.3,37.3 | H4RF_C_5.1 6.1,32.31 v6.1,33.7 | H4RF_R_8.1 3.5,38.85 v3.5,39.8 | H4RF_C_IN4.1 5.83,39.87 v5.8,39.9 | SF_PREAMP3.2 44.23,60.73 v44.1,60.6 | PA_R15.1 50.93,35.67 v50.4,36.2 | PF_R15.1 75.23,36.57 v74.6,37.2 | ADC_H7.10 40.76,34.55 v40.9,34.4 | ADC_H7.31 44.76,34.55 v44.7,34.6 | ADC_H7.30 47.05,34.05 v47.1,34.1 | ADC_H7.5 42.53,37.37 v42,37.9 | ADC_H7.23 44.03,30.87 43.6,31.3 v42.7,31.3 | v42.7,31.3 42,31.3 41.53,30.83 ADC_H7.18 | ADC_H7.21 43.03,30.97 v42.7,31.3 | ADC_H7.14 38.74,32.55 v38.5,32.3 | ADC_PA.5 66.83,36.67 v66.3,37.2 | ADC_PA.30 71.16,33.36 v71.3,33.5 | ADC_PA.26 71.24,31.36 v71.3,31.3 | ADC_PA.23 68.33,30.17 68,30.5 67,30.5 | 67,30.5 66.6,30.5 | 66.6,30.5 66,30.5 65.83,30.33 ADC_PA.18 | ADC_PA.21 67.33,30.17 67,30.5 | 66.6,30.5 | 66.6,30.5 v66.6,30.58 | ADC_PA.16 ADC_PA.15 ADC_PA.14 | ADC_PA.14 ADC_PA.13 ADC_PA.12 | ADC_PA.14 62.96,31.86 v62.8,31.7 | ADC_PA.10 65.04,33.86 v65.2,33.7
  Top 0.152: ADC_PF.31 93.22,34.08 v93.2,34.1 | ADC_PF.30 95.53,33.58 v95.6,33.5 | ADC_PF.26 95.53,31.57 v95.6,31.5 | ADC_PF.16 ADC_PF.15 ADC_PF.14 | ADC_PF.14 ADC_PF.13 ADC_PF.12 | ADC_PF.14 87.17,32.08 v87,31.9 | ADC_PF.10 89.03,34.08 v89.3,33.8 | ADC_PF.5 91.03,36.97 v90.8,37.2 | ADC_PF.23 92.53,30.47 92.3,30.7 92.2,30.8 v91.1,30.8 | ADC_PF.18 90.03,30.33 90.5,30.8 v91.1,30.8 | ADC_PF.21 91.53,30.37 v91.1,30.8 | ADC_H8.10 14.2,34.53 v13.98,34.32 | ADC_H8.16 ADC_H8.15 ADC_H8.14 | ADC_H8.14 ADC_H8.13 ADC_H8.12 | ADC_H8.14 14.33,32.53 v14,32.2 | ADC_H8.5 18.03,37.27 v17.8,37.5 | ADC_H8.31 20.33,34.53 v20.2,34.4 | ADC_H8.30 22.47,34.03 v22.6,33.9 | ADC_H8.26 22.47,32.03 v22.6,31.9 | ADC_H8.23 19.53,30.77 19,31.3 18.99,31.29 v18.33,31.29 | ADC_H8.18 17.03,30.66 17.67,31.3 18,31.3 18.01,31.29 v18.33,31.29 | ADC_H8.21 18.53,30.77 18.33,30.97 v18.33,31.29 | v80.2,35.7 80.24,35.66 81.4,35.66 | 81.4,35.66 PF_REFGEN.8 | PF_REFGEN.7 81.49,35.57 81.4,35.66 | ADC_PA.31 69.04,33.86 v69,33.9 | ADC_H7.26 47.05,32.05 v47.1,32.1
  Bottom 0.152: H4_C_POW4.2 44.02,34.6 v44.7,34.6 | H4ADC_C4.2 43.05,31.3 v42.7,31.3 | v66.6,30.58 67.41,29.77 PA_C16.2 | PF_C19.2 92.5,34.1 v93.2,34.1 | PF_C16.2 91.52,30.38 v91.1,30.8 | v20.2,34.4 19.98,34.17 H4_C_POW3.2 | v18.33,31.29 18.48,31.29 H4ADC_C3.2 | PA_C19.2 68.29,33.9 v69,33.9
  pour GND: 0,80 100,80 100,0 0,0
N$1
  Top 0.152: PA_C5.2 69.62,48.25 69,48.25 PA_DA.5 68.8,47.25 PA_R8.1
N$2
  Top 0.152: PA_C7.1 67.6,51.45 PA_R7.2 69.1,50.3 PA_DA.8 68.85,49.95 PA_C5.1
N$3
  Top 0.152: PA_C7.2 64.15,51.4 PA_R11.2 64.4,51.15 PA_DA.1 64.35,49.95 PA_C9.1
N$4
  Top 0.152: PA_R6.2 67.5,53.15 PA_C6.1 69.05,53.1 PA_R7.1 PA_R5.1
N$5
  Top 0.152: PA_R10.2 65.7,53.15 PA_C6.2 64.15,53.1 PA_R11.1 PA_R14.1
N$6
  Top 0.152: PA_R12.1 64.4,47.95 PA_DA.4 62.7,48.05 PA_C9.2
N$7
  Top 0.152: PA_R9.1 PA_R8.2 69.25,44.85 71.8,47.4 71.8,50.35 PA_R5.2
N$8
  Top 0.152: PA_R13.1 65.8,44.8 | 65.8,44.8 PA_R12.2 | PA_R14.2 61.4,50.35 61.4,47.7 64.3,44.8 65.8,44.8
N$9
  Top 0.152: PF_C24.2 44.6,48.75 PF_DA2.5 43.6,47.75 PF_R33.1
N$10
  Top 0.152: PF_C24.1 45.95,50.6 PF_DA2.8 44.7,50.8 PF_R29.2 43.4,51.95 PF_C26.1
N$11
  Top 0.152: PF_C25.1 38.65,50.6 PF_DA2.1 40.2,50.7 PF_R32.2 41.6,51.95 PF_C26.2
N$12
  Top 0.152: PF_R35.1 PF_R29.1 44.65,53.6 43.5,53.6 | PF_C27.1 43.5,53.6 | PF_R30.2 43.3,53.8 43.5,53.6
N$13
  Top 0.152: PF_R36.1 PF_R32.1 41.6,53.65 PF_C27.2 41.7,53.65 PF_R31.2
N$14
  Top 0.152: PF_R34.1 PF_DA2.4 PF_C25.2
N$15
  Top 0.152: PF_R37.1 PF_R33.2 45.15,45.65 47.2,47.7 47.2,51.15 PF_R35.2
N$16
  Top 0.152: PF_R38.1 PF_R34.2 39.25,45.65 37.1,47.8 37.1,50.95 PF_R36.2
N$17
  Top 0.152: PF_R43.1 20,48.65 PF_DA3.5 21.7,48.65 PF_C29.2
N$18
  Top 0.152: PF_C31.1 20.45,51.8 PF_R39.2 20.5,50.8 PF_DA3.8 21.65,50.6 PF_C29.1
N$19
  Top 0.152: PF_C31.2 17.4,51.75 PF_R42.2 PF_DA3.1 14.35,50.6 PF_C30.1
N$20
  Top 0.152: PF_R39.1 20.6,53.55 | 20.6,53.55 PF_R45.1 | 20.6,53.55 20.45,53.4 PF_C32.1 19.1,53.45 PF_R40.2
N$21
  Top 0.152: PF_R46.1 PF_R42.1 17.4,53.45 PF_C32.2 17.6,53.55 PF_R41.2
N$22
  Top 0.152: PF_C30.2 14.3,48.65 PF_DA3.4 16.8,47.75 PF_R44.1
N$23
  Top 0.152: PF_R47.1 18.8,45.6 PF_R43.2 20.95,45.75 22.9,47.7 22.9,51.25 PF_R45.2
N$24
  Top 0.152: PF_R44.2 16.8,45.7 | 16.8,45.7 PF_R48.1 | PF_R46.2 13.1,50.85 13.1,47.9 15.3,45.7 16.8,45.7
N$88
  Top 0.152: PF_R13.1 88.42,43.23 88.42,45.2 PF_R12.2 86.45,45.35 84.1,47.7 84.1,50.6 84.79,51.29 PF_R14.2
N$97
  Top 0.152: PF_R8.1 90.33,47.08 PF_DA.5 92.92,48.25 PF_C5.2
N$98
  Top 0.152: PF_C5.1 92.86,50.2 91.7,50.2 | 91.7,50.2 PF_DA.8 | 91.7,50.2 91.7,51.31 PF_R7.2 PF_C7.1
N$99
  Top 0.152: PF_C7.2 88.7,51.41 PF_R11.2 86.91,50.4 PF_DA.1 85.37,50.2 PF_C9.1
N$100
  Top 0.152: PF_C6.1 90.6,53 | 90.6,53 91.69,53 PF_R7.1 93.84,53.09 PF_R5.1 | PF_R6.2 90.6,54.34 90.6,53
N$101
  Top 0.152: 88.61,53.11 PF_R11.1 PF_R14.1 | 88.61,53.11 PF_C6.2 | PF_R10.2 88.61,54.5 88.61,53.11
N$102
  Top 0.152: PF_R12.1 87.22,48.25 PF_DA.4 85.5,48.25 PF_C9.2
N$103
  Top 0.152: PF_REFGEN.4 PF_C11.2
N$104
  Top 0.152: PF_R15.2 77.03,34.41 PF_REFGEN.3
N$105
  Top 0.152: PF_R16.2 83.33,37.09 PF_C12.1
N$109
  Top 0.152: PF_R9.1 90.33,43.21 90.33,45 PF_R8.2 91.67,45.27 93.87,47.47 PF_R5.2
N$110
  Top 0.152: PA_REFGEN.4 52.89,32.05 PA_C11.2
N$116
  Top 0.152: PA_REFGEN.3 51.57,34.06 PA_R15.2
N$117
  Top 0.152: PA_C12.1 58.91,37.12 PA_R16.2
N$118
  Top 0.152: H4_REFGEN3.4 H4RF_C_3.2
N$121
  Top 0.152: H4_REFGEN3.3 28.19,34.57 27.57,34.57 27.22,34.22 H4RF_R_6.2
N$124
  Top 0.152: H4RF_R_7.2 33.98,36.31 H4RF_C_O8.1
N$129
  Top 0.152: H4_REFGEN4.4 H4RF_C_5.2
N$130
  Top 0.152: H4_REFGEN4.3 3.33,34.47 2.9,34.9 2.9,36.4 3.52,37.02 H4RF_R_8.2
N$131
  Top 0.152: H4RF_R_9.2 10.08,35.59 H4RF_C_O10.1
N$132
  Top 0.152: ADC_PF.2 92.53,37.03 92.91,37.41 PF_C14.2
N$133
  Top 0.152: PF_R1.1 89.53,65.09 PF_C2.2
N$134
  Top 0.152: PF_R2.1 89.71,59.21 PF_C1.1 | PF_R1.2 89.53,59.43 PF_C1.1 | PF_C1.1 90.92,59.23 PF_PREAMP.3
N$135
  Top 0.152: PF_PREAMP.1 92.4,59.26 PF_C3.1 93.34,59.27 PF_R3.1 PF_R4.1
N$136
  Top 0.152: PA_C15.2 70.91,36.1 69.22,36.1 ADC_PA.1
N$137
  Top 0.152: PA_C2.2 67.53,65.55 PA_R1.1
N$138
  Top 0.152: PA_R2.1 66.01,61.65 PA_C1.1 67.52,61.67 PA_PREAMP.3 67.58,63.7 PA_R1.2
N$139
  Top 0.152: PA_PREAMP.1 69.25,61.61 PA_C3.1 71.71,62.3 PA_R3.1 PA_R4.1
N$140
  Top 0.152: ADC_PA.8 62.9,35.71 PA_R18.1
N$141
  Top 0.152: SF_C2.2 SF_R1.1
N$142
  Top 0.152: SF_R2.1 40.25,61.41 SF_C1.1 42.61,61.41 42.65,61.45 SF_PREAMP3.3 43.63,61.5 SF_R1.2
N$143
  Top 0.152: SF_PREAMP3.1 45.25,61.45 SF_C3.1 46.04,62.25 SF_R3.1 48.03,62.15 SF_R4.1
N$144
  Top 0.152: ADC_PA.7 65.83,36.57 65.5,36.9 65.11,36.9 PA_R17.1
N$145
  Top 0.152: SA_C2.2 17.73,64.33 SA_R1.1
N$146
  Top 0.152: SA_R2.1 17.81,61.13 SA_C1.1 19.24,61.15 H4_PREAMP4.3 19.28,62.58 SA_R1.2
N$147
  Top 0.152: H4_PREAMP4.1 21.53,62.14 SA_C3.1 23.34,62.17 SA_R3.1 23.53,62.19 SA_R4.1
N$148
  Top 0.152: ADC_PA.11 62.06,33.36 PA_C17.1
N$149
  Top 0.152: ADC_PA.25 71.83,29.33 PA_C18.2
N$150
  Top 0.152: ADC_PF.1 95.23,35.92 PF_C15.2
N$151
  Top 0.152: PA_C14.2 68.68,36.91 68.33,36.56 ADC_PA.2
N$152
  Top 0.152: ADC_PF.8 87.58,35.92 PF_R18.1
N$153
  Top 0.152: PF_R17.1 89.61,37.29 90.03,36.87 ADC_PF.7
N$154
  Top 0.152: ADC_PF.11 86.36,33.58 PF_C17.1
N$155
  Top 0.152: PF_C18.2 94.91,30.69 94.52,31.07 ADC_PF.25
N$156
  Top 0.152: ADC_H7.1 44.94,36.8 H4_C13.2
N$157
  Top 0.152: ADC_H7.8 40.66,36.76 H4_R8.1
N$158
  Top 0.152: H4_R5.1 40.82,38.28 41.53,37.57 ADC_H7.7
N$159
  Top 0.152: ADC_H7.11 37.87,34.05 H4_C14.1
N$160
  Top 0.152: H4_C15.2 46.53,31.02 46,31.55 ADC_H7.25
N$161
  Top 0.152: ADC_H7.2 44.03,37.24 H4_C12.2
N$162
  Top 0.152: ADC_H8.1 22.34,36.38 H4_C17.2
N$163
  Top 0.152: ADC_H8.8 14.24,36.38 H4_R10.1
N$164
  Top 0.152: H4_R9.1 16.65,37.85 17.03,37.47 ADC_H8.7
N$165
  Top 0.152: ADC_H8.11 14.47,34.03 H4_C18.1
N$166
  Top 0.152: H4_C19.2 21.83,31.08 ADC_H8.25
N$167
  Top 0.152: ADC_H8.2 19.53,37.43 19.91,37.81 H4_C16.2
RAW_PA
  Top 0.152: PA_IN.1 67.37,68.89 PA_C2.1
RAW_PF
  Top 0.152: PF_IN.1 88.27,72.4 89.33,71.34 PF_C2.1
RAW_SA
  Top 0.152: SA_C2.1 15.68,70.91 SA_IN.1
RAW_SF
  Top 0.152: SF_IN.1 43.87,68.41 SF_C2.1
REF_PA
  Top 0.152: PA_REFGEN.6 PA_REFGEN.5 58.8,33.41 PA_C12.2 PA_C13.2 61,34.3 61.07,34.36 ADC_PA.9
REF_PF
  Top 0.152: 83.35,34.18 PF_C13.2 85.43,34.58 | 83.35,34.18 PF_C12.2 82.88,33.71 PF_REFGEN.5 | 85.43,34.58 85.5,34.58 | 85.5,34.58 ADC_PF.9 | PF_REFGEN.6 83.17,34.36 83.35,34.18 | 85.43,34.58 85.5,34.58
REF_SA
  Top 0.152: H4_REFGEN4.6 H4_REFGEN4.5 10,33.82 H4RF_C_O10.2 10.15,33.96 H4RF_C_O9.2 12.83,33.96 13.9,35.03 ADC_H8.9
REF_SF
  Top 0.152: H4_REFGEN3.6 H4_REFGEN3.5 34.18,34.11 H4RF_C_O8.2 36.11,34.26 H4RF_C_O7.2 36.89,35.05 ADC_H7.9
SCLK  (via drill 0.35)
  Top 0.152: ADC_H7.22 43.53,18.13 v43.5,18.1 | ADC_PA.22 67.83,18.13 v67.8,18.1 | ADC_PF.22 92.03,18.17 v92.1,18.1 | ADC_H8.22 19.03,18.37 v19.5,17.9
  Bottom 0.152: U$2.9 18.94,9.94 18.94,17.34 v19.5,17.9 19.6,18 19.7,18.1 v43.5,18.1 43.8,18.1 v67.8,18.1 68.3,18.1 76.8,18.1 v92.1,18.1
START  (via drill 0.35)
  Top 0.152: ADC_H7.17 41.03,16.63 v41,16.6 | ADC_PA.17 65.33,16.63 v65.3,16.6 | ADC_PF.17 89.53,16.63 v89.5,16.6 | ADC_H8.17 16.53,17.47 18.8,15.2 v19.99,15.2 v20,15.21
  Bottom 0.152: U$2.12 v20,15.21 20,16 20.6,16.6 39.8,16.6 v41,16.6 64.3,16.6 v65.3,16.6 v89.5,16.6